# Altium PCB PCB1.PcbDoc (part 1 of 2)
Units mil, origin at the board's own origin, x right, y up, seen from the top; angles counter-clockwise.
Board outline 5117.33 x 2903.43 mil, 4 copper layers (Top Layer, Layer 1, Layer 2, Bottom Layer), stack 62.13 mil thick; 147 components, 97 nets, 532 pads, 86 vias.
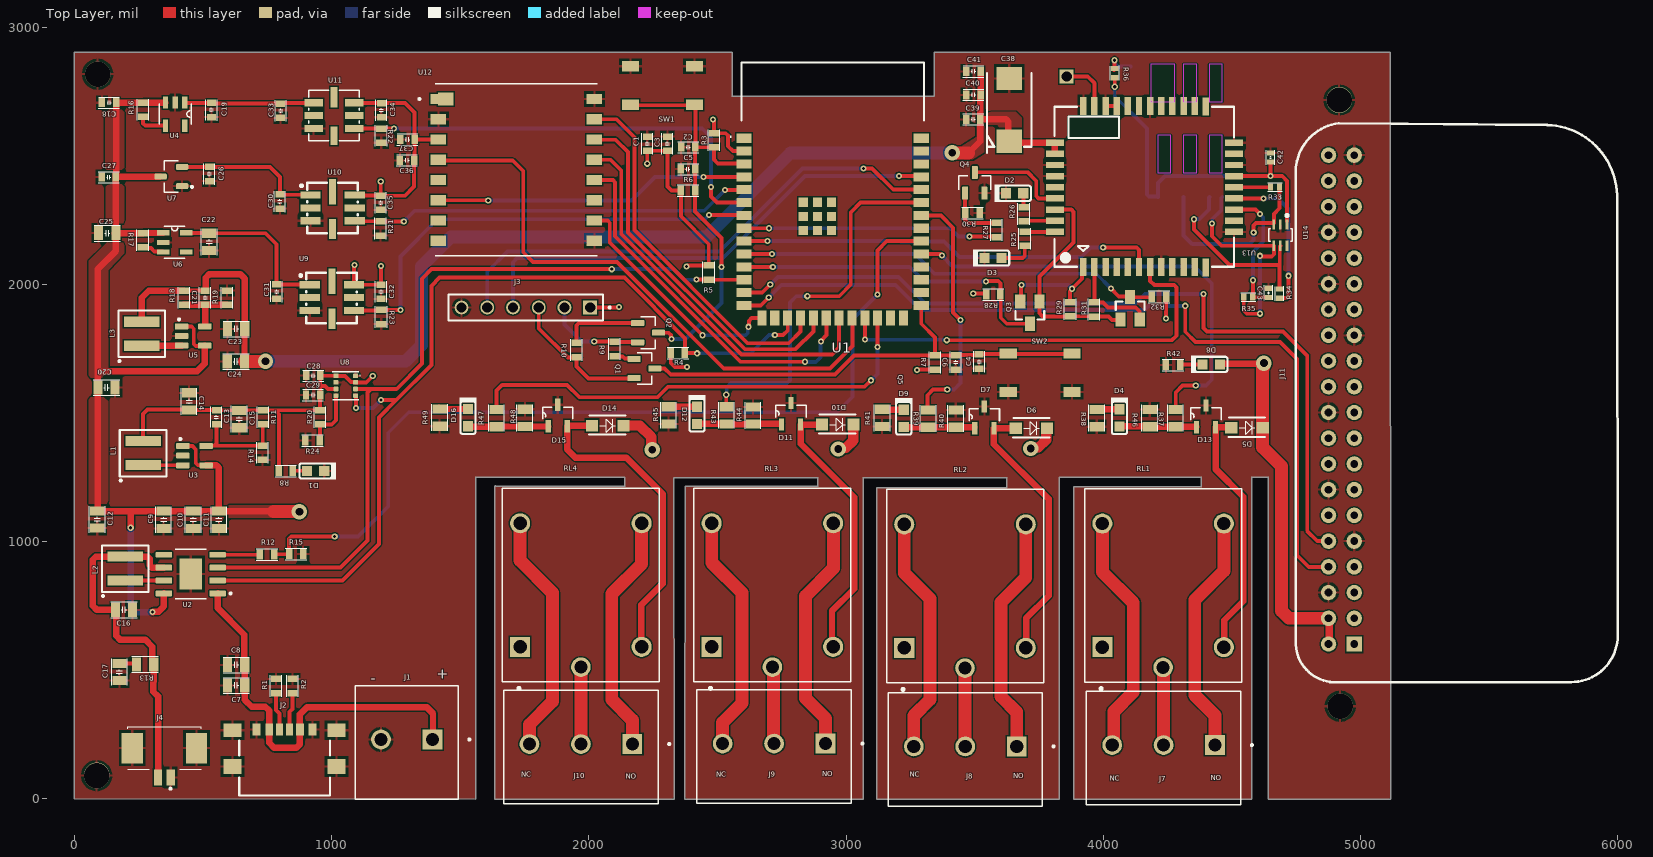
[diagram p0: Top Layer view]
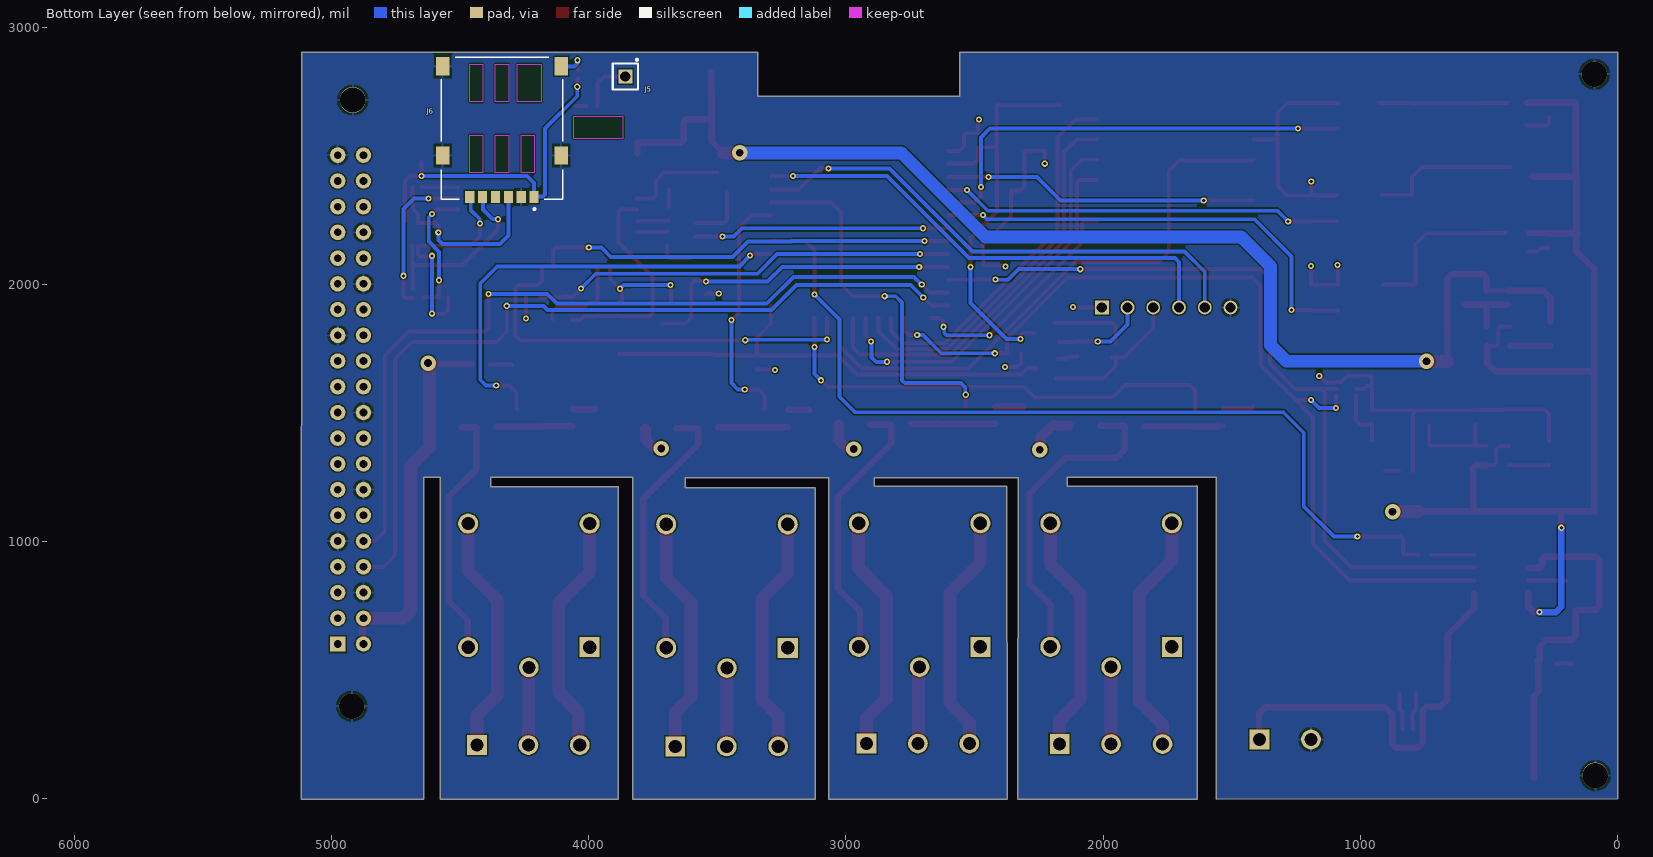
[diagram p1: Bottom Layer view, seen from below]
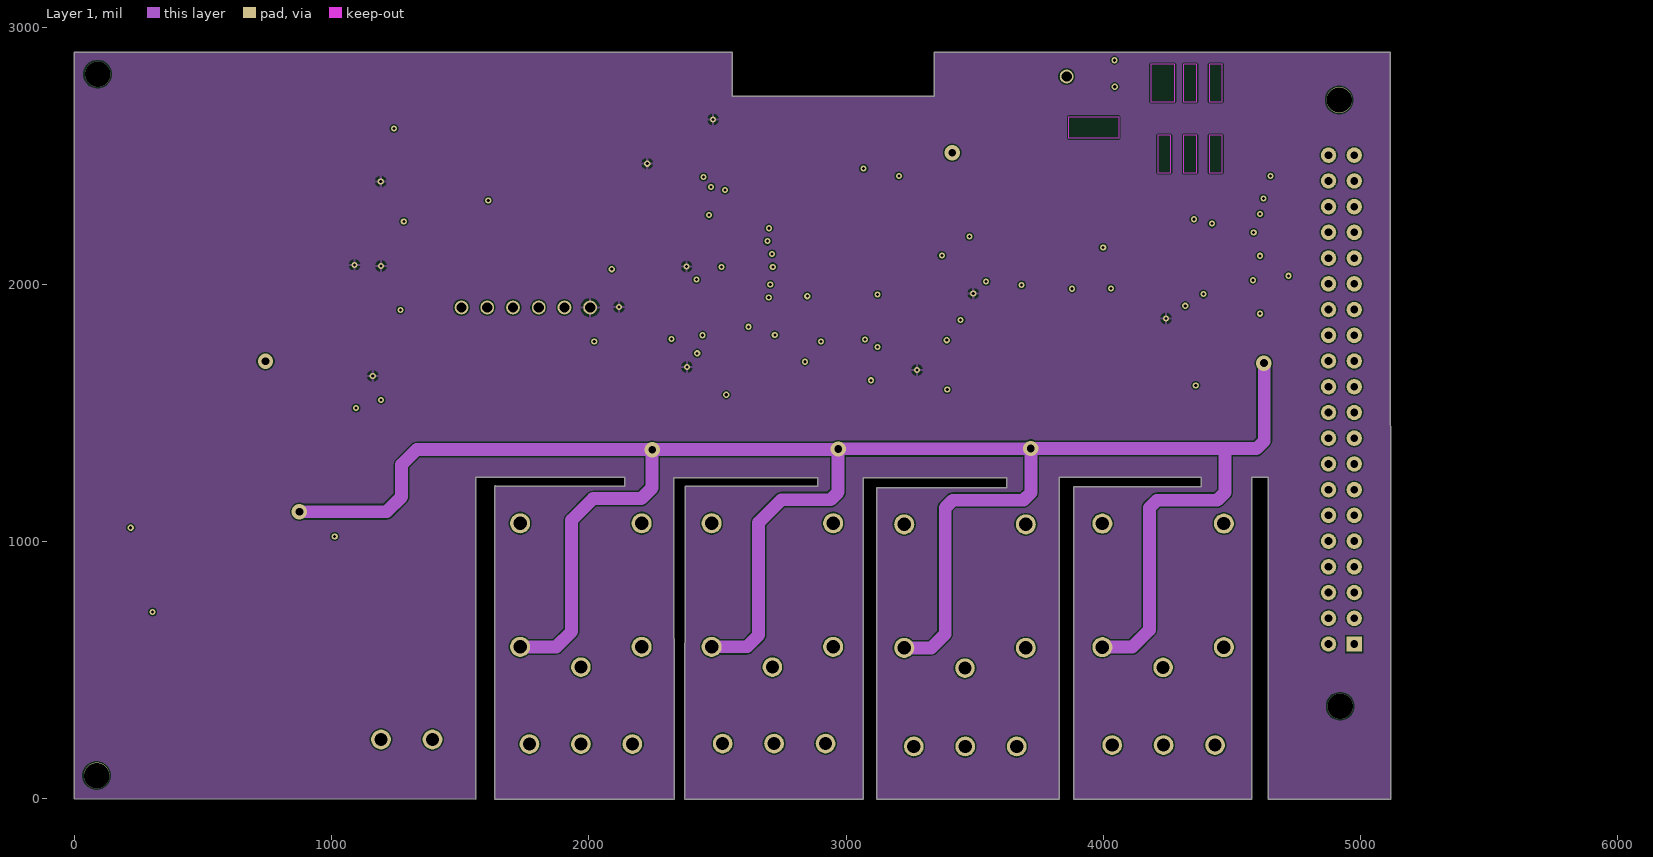
[diagram p2: Layer 1]
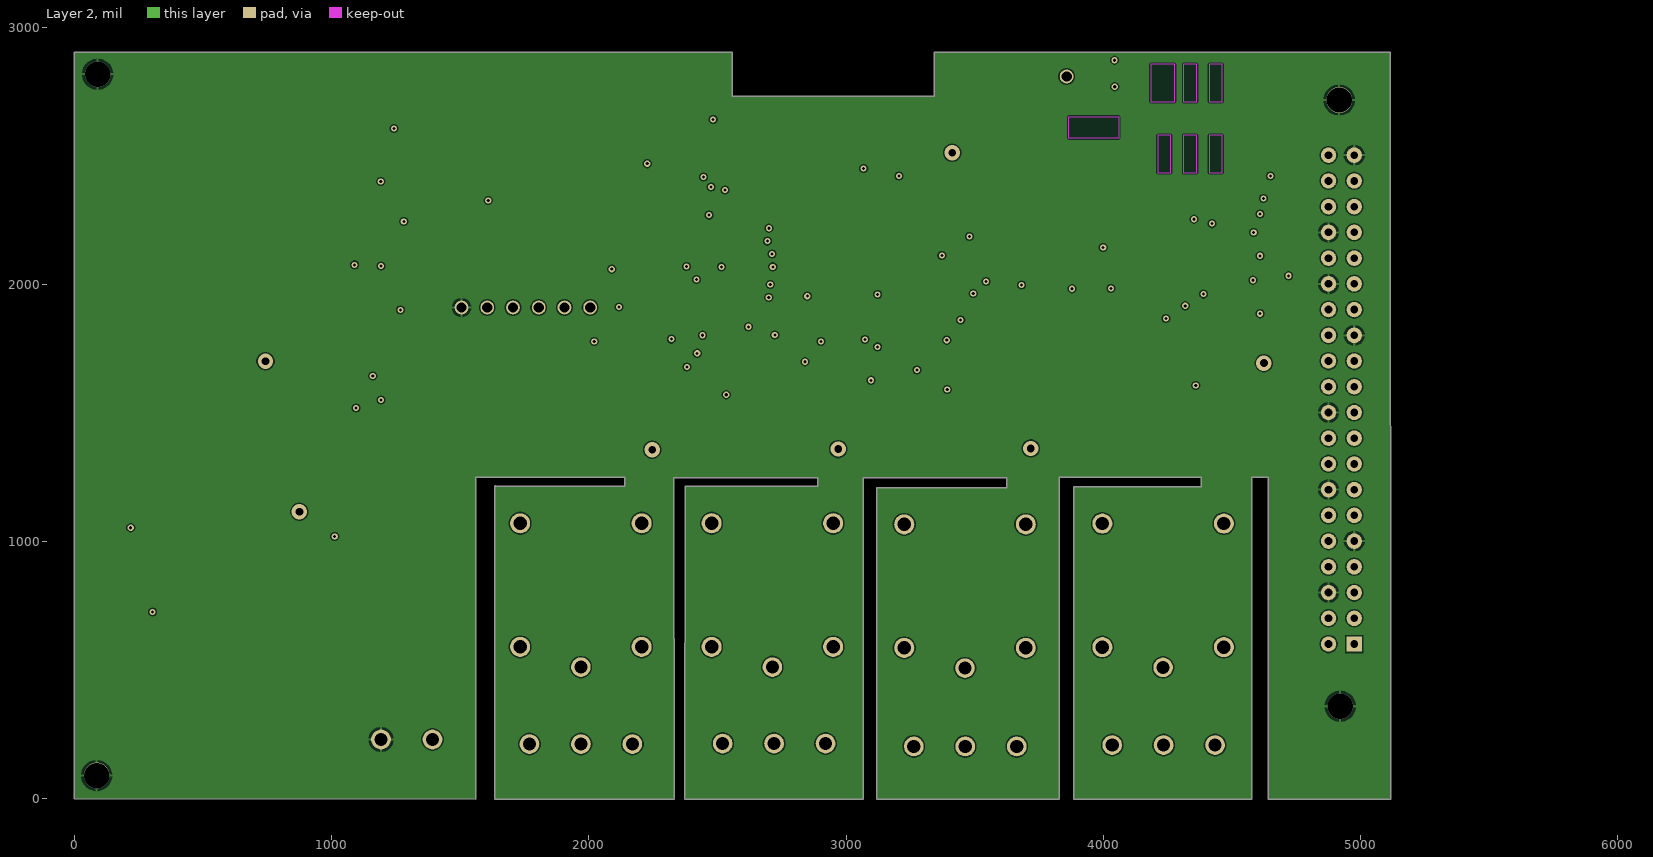
[diagram p3: Layer 2]
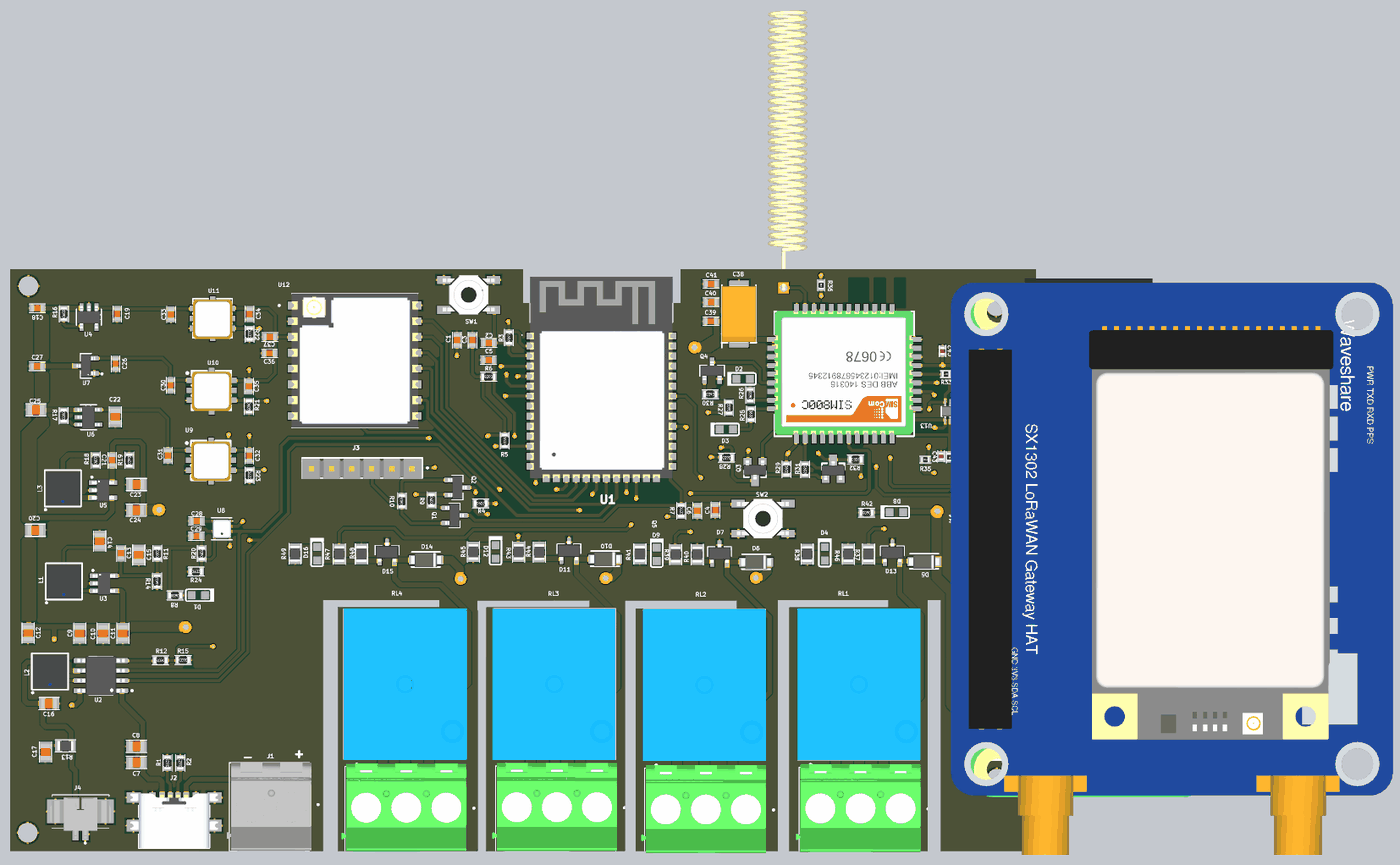
[diagram p5: 3D render of the assembled board from above, using the file's embedded part models]

## Layer stack, top to bottom
Top Solder: solder mask 0.4, Solder Resist, Dk 3.5
Top Layer: signal copper 1.38
Dielectric 4: prepreg 4.21, PP-017, Dk 4.05
Dielectric 2: prepreg 3.91, PP-017, Dk 4.05
Layer 1: signal copper 0.6
Dielectric 1: core 41.93, Core-042, Dk 4.5
Layer 2: signal copper 0.6
Dielectric 3: prepreg 3.91, PP-017, Dk 4.05
Dielectric 5: prepreg 4.21, PP-017, Dk 4.05
Bottom Layer: signal copper 1.38
Bottom Solder: solder mask 0.4, Solder Resist, Dk 3.5

## Board outline
3885,1214 4380,1214 4380,1250 3920,1250 3829,1250 3829,-1.43 3118,-1.43 3118,1209 3624,1209 3624,1248 3066,1248 3066,-1.43 2373.02,-1.43 2374,1216 2889,1216 2889,1249 2830,1249 2402,1248 2330.49,1248 2331.52,-1.43 1635,-1.43 1635,1216 1636,1217 1637,1216 2139,1216 2139,1250 1560,1250 1560,-1.43 -0.19,0.14 0,2902 2558,2902 2558,2732 3343,2732 3343,2902 5115.57,2902 5117.14,-1.43 4641,-1.43 4641,1250 4576,1250 4576,-1.43 3885,-1.43

## Design rules (kind name [scope] priority, off if disabled: settings)
Clearance [All] p1: gap=5 ignorepadtopadclearanceinfootprint=TRUE
MinimumSolderMaskSliver [All] p1: minsoldermaskwidth=3
PolygonConnect [All] p1: connectstyle=Relief reliefconductorwidth=10 reliefentries=4 polygonreliefangle="90 Angle" airgapwidth=10
RoutingVias [All] p1: holewidth=28 width=50 viastyle="Through Hole" minholewidth=28 minwidth=50 maxholewidth=28 maxwidth=50
SilkToSilkClearance [All] p1: silktosilkclearance=0.1
SilkToSolderMaskClearance [IsPad] p1: minsilkscreentomaskgap=0.01 clearancetoexposedcopper=TRUE
SolderMaskExpansion [All] p1: expansion=4 istentingtop=FALSE
SupplyNets "Schematic Supply Nets_8" [InNet('2V5')] p1: voltage=0.000
SupplyNets "Schematic Supply Nets_7" [InNet('3V3')] p2: voltage=0.000
SupplyNets "Schematic Supply Nets_6" [InNet('2V8')] p3: voltage=0.000
SupplyNets "Schematic Supply Nets_5" [InNet('V_Input')] p4: voltage=0.000
SupplyNets "Schematic Supply Nets_4" [InNet('2V')] p5: voltage=0.000
SupplyNets "Schematic Supply Nets_3" [InNet('4V')] p6: voltage=0.000
SupplyNets "Schematic Supply Nets_2" [InNet('VDD_EXT')] p7: voltage=0.000
SupplyNets "Schematic Supply Nets_1" [InNet('5V')] p8: voltage=0.000
SupplyNets "Schematic Supply Nets" [InNet('GND')] p9: voltage=0.000
UnRoutedNet [All] p1: checkbadconnections=TRUE
Width [All] p1: maxlimit=150 minlimit=13.57 preferedwidth=13.57 minimp=50.000000 maximp=50.000000 favimp=50.000000
26 further rules are at their usual default settings.

## Classes and differential pairs
polygon class GND: 4V_L01_P019
component class "Realy Section": D4 D5 D6 D7 D8 D9 D10 D11 D12 D13 D14 D15 D16 J7 J8 J9 J10 R37 R38 R39 R40 R41 R42 R43 R44 R45 R46 R47 R48 R49 RL1 RL2 RL3 RL4
component class TopSheet: J1 J2 J3 R1 R2
component class Sensors: C28 C29 C30 C31 C32 C33 C34 C35 R20 R21 R22 R23 R24 U8 U9 U10 U11
component class R_pi_LG: J11
component class Power: C7 C8 C9 C10 C11 C12 C13 C14 C15 C16 C17 C18 C19 C20 C21 C22 C23 C24 C25 C26 C27 J4 L1 L2 L3 R11 R12 R13 R14 R15 R16 R17 R18 R19 U2 U3 U4 U5 U6 U7
component class MCU: C1 C2 C3 C4 C5 C6 D1 Q1 Q2 R3 R4 R5 R6 R7 R8 R9 R10 SW1 SW2 U1
component class LoRa: C36 C37 U12
component class GSM: C38 C39 C40 C41 C42 C43 D2 D3 J5 J6 Q3 Q4 Q5 R25 R26 R27 R28 R29 R30 R31 R32 R33 R34 R35 R36 U13 U14

## Components (designator, comment, footprint, x,y, rotation, side; value= is the part's Value field where it differs from the comment)
C1 "22uF" C0603 2227,2547 r90 top
C2 "1uF" C0603 2386,2533 r0 top
C3 "22uF" C0603 2305,2547 r90 top
C4 "100nF" C0603 3517,1700 r90 top
C5 "100nF" C0603 2385,2448 r180 top
C6 "100nF" C0603 3426,1696.56 r270 top
C7 "10uF" C0805 629,441 r0 top
C8 "10uF" C0805 629,521 r0 top
C9 "22uF" C0805 347,1085 r90 top
C10 "22uF" C0805 462,1085 r90 top
C11 "22uF" C0805 562,1085 r90 top
C12 "22uF_6.3V" C0805 89,1086 r90 top
C13 "47pF" C0603 552,1484 r90 top
C14 "22uF_6.3V" C0805 446,1545 r270 top
C15 "22uF_6.3V" C0805 641,1476 r90 top
C16 "22uF" C0805 193,735 r180 top
C17 "10uF" C0805 175,493 r90 top
C18 "1uF" C0603 135,2706 r0 top
C19 "1uF" C0603 533,2678 r90 top
C20 "22uF_6.3V" C0805 125,1599 r180 top
C21 "47pF" C0603 508,1948 r90 top
C22 "1uF" C0805 524,2165 r90 top
C23 "22uF_6.3V" C0805 629,1827 r0 top
C24 "22uF_6.3V" C0805 628,1700 r0 top
C25 "1uF" C0805 128,2199 r0 top
C26 "1uF" C0603 525,2429 r90 top
C27 "1uF" C0603 134,2417 r0 top
C28 "100nF" C0603 929,1645 r0 top
C29 "100nF" C0603 928,1570 r0 top
C30 "100nF" C0603 799,2322 r90 top
C31 "100nF" C0603 786,1972 r90 top
C32 "100nF" C0603 1192,1971 r90 top
C33 "100nF" C0603 802,2675 r90 top
C34 "100nF" C0603 1193,2677 r90 top
C35 "100nF" C0603 1191,2317 r90 top
C36 "100nF" C0603 1293,2482 r0 top
C37 "100nF" C0603 1295,2563 r0 top
C38 "TPSE477K010R0060" CAPPM7344X430N 3634,2678 r90 top
C39 "10uF" C0603 3493.96,2641.48 r0 top
C40 "33pF" C0603 3494.96,2736.48 r0 top
C41 "10pF" C0603 3494.96,2827.48 r0 top
C42 "100nF" C0402 4650,2493 r90 top
C43 "22pF" C0402 4642,1967 r270 top
D1 "REDLED" 0603D-B 938,1275 r180 top
D2 "RED" 0603D-B 3655,2354 r0 top
D3 "RED" 0603D-B 3571,2102 r0 top
D4 "Generic LED" 0603D-B 4062,1481 r270 top
D5 "1N4001W-T" SODFL3818X130N 4558,1442 r180 top
D6 "1N4001W-T" SODFL3818X130N 3720,1440 r180 top
D7 "ZXMS6004FFQTA" SOT95P240X100-3N 3537,1483 r90 top
D8 "Generic LED" 0603D-B 4419,1689 r0 top
D9 "Generic LED" 0603D-B 3224,1479 r270 top
D10 "1N4001W-T" SODFL3818X130N 2967,1455 r180 top
D11 "ZXMS6004FFQTA" SOT95P240X100-3N 2786,1497 r90 top
D12 "Generic LED" 0603D-B 2420,1491 r270 top
D13 "ZXMS6004FFQTA" SOT95P240X100-3N 4399,1487 r90 top
D14 "1N4001W-T" SODFL3818X130N 2073,1451 r180 top
D15 "ZXMS6004FFQTA" SOT95P240X100-3N 1879,1490 r90 top
D16 "Generic LED" 0603D-B 1530,1482 r270 top
J1 "1711725" PHOENIX_1711725 1492,439.66 r180 top
J2 "USB4135-GF-A_REVA" GCT_USB4135-GF-A_REVA 817,126 r0 top
J3 "MTSW-106-07-L-S-170" SAMTEC_MTSW-106-07-L-S-170 1755,1910 r0 top
J4 "53261-7002" 532617002 350,157.63 r180 top
J5 "ANT_915MHz" SAMTEC_HTSW-101-24-LM-S 3857,2808 r270 bottom
J6 "NSIM-2-C" CUI_NSIM-2-C 4336.69,2501 r0 bottom
J7 "1711738" 1711738 4534,417.77 r180 top
J8 "1711738" 1711738 3763,412.77 r180 top
J9 "1711738" 1711738 3020,423.77 r180 top
J10 "1711738" 1711738 2269,421.77 r180 top
J11 "Raspberry pi compatible header" pi_header 4975,602 r90 top
L1 "2.2uH-DCR<0.1R-2A" "4.0 mm × 4.0 mm" 267,1344 r90 top
L2 "1uH" "4.0 mm × 4.0 mm" 198,895 r90 top
L3 "2.2uH-DCR<0.1R-2A" "4.0 mm × 4.0 mm" 262,1808 r90 top
Q1 "S8050" SOT95P237X112-3N#1 2216,1673 r0 top
Q2 "S8050" SOT95P237X112-3N#1 2230,1812 r0 top
Q3 "SI2302" SOT23 3714,1890 r180 top
Q4 "S8050" SOT95P237X112-3N#1 3500,2395 r90 top
Q5 "SI2302" SOT23 4104,1907 r0 top
R1 "5.11k" R0603 784,439 r90 top
R2 "5.11k" R0603 848,439 r90 top
R3 "10K" R0603 2487,2560 r270 top
R4 "4.7K" R0603 2346,1733 r0 top
R5 "4.7K" R0603 2466,2046 r270 top
R6 "4.7K" R0603 2385,2365 r180 top
R7 "4.7K" R0603 3346,1696 r270 top
R8 "470R" R0603 822,1274 r180 top
R9 "10K" R0603 2100,1749 r270 top
R10 "10K" R0603 1952,1745 r90 top
R11 "453K" R0603 733,1483 r90 top
R12 "NC" R0603 749,950 r180 top
R13 "2R" R0805 275,523 r0 top
R14 "100K" R0603 732,1345 r90 top
R15 "NC/10K" R0603 862,952 r180 top
R16 "200k" R0603 267,2679 r90 top
R17 "200K" R0603 266,2171 r270 top
R18 "560K" R0603 426,1948 r90 top
R19 "100K" R0603 593,1948 r270 top
R20 "NC" R0603 955,1483 r90 top
R21 "4.7K" R0603 1190,2217 r270 top
R22 "4.7K" R0603 1193,2578 r270 top
R23 "4.7K" R0603 1193,1873 r270 top
R24 "0R" R0603 926,1393 r0 top
R25 "330R" R0603 3694,2177 r270 top
R26 "330R" R0603 3690.53,2273 r90 top
R27 "1k" R0603 3585,2211 r90 top
R28 "10K" R0603 3572,1961 r180 top
R29 "100K" R0603 3871,1903 r270 top
R30 "4.7K" R0603 3491,2278 r180 top
R31 "10K" R0603 3964,1902 r270 top
R32 "10K" R0603 4216,1952 r0 top
R33 "22R" R0402 4667,2378 r0 top
R34 "22R" R0402 4685,1964 r90 top
R35 "22R" R0402 4563,1951 r180 top
R36 "10K" R0402 4044,2821 r90 top
R37 "10K" R0805 4280,1480 r270 top
R38 "1K" R0805 3974,1480 r270 top
R39 "10K" R0805 3319,1478 r270 top
R40 "10K" R0805 3426,1478 r90 top
R41 "1K" R0805 3140,1481 r270 top
R42 "470" R0603 4270.44,1687 r180 top
R43 "10K" R0805 2535,1491 r270 top
R44 "10K" R0805 2638,1490 r90 top
R45 "1K" R0805 2310,1491 r270 top
R46 "10K" R0805 4180,1480 r90 top
R47 "10K" R0805 1641,1480 r270 top
R48 "10K" R0805 1751,1481 r90 top
R49 "1K" R0805 1420,1482 r270 top
RL1 "SRD-05VDC-SL-C" SRD-05VDC-SL-C 4232,830.11 r90 top
RL2 "SRD-05VDC-SL-C" SRD-05VDC-SL-C 3462,827.11 r90 top
RL3 "SRD-05VDC-SL-C" SRD-05VDC-SL-C 2713.22,831.27 r90 top
RL4 "SRD-05VDC-SL-C" SRD-05VDC-SL-C 1969,831.11 r90 top
SW1 "CPG151101S11" "5.2 mm × 5.2 mm SW" 2286,2773 r0 top
SW2 "CPG151101S11" "5.2 mm × 5.2 mm SW" 3754,1657 r180 top
U1 "ESP32-S3-WROOM-1-N16R8" ESP32S3WROOM1N8R2 2932.51,2385.91 r0 top
U2 "IP5306" SOP127P600X165-9N 452.47,874 r180 top
U3 "SY8089" SOT95P280X145-5N 467,1334 r0 top
U4 "BL8555-28PRA" TSOT-23_S5 392,2662 r270 top
U5 "SY8089" SOT95P280X145-5N 462,1799 r0 top
U6 "BL8555-25PRA" TSOT-23_S5 390,2163 r0 top
U7 "ME6206A20M3G" SOT95P237X112-3N#2 377,2419 r180 top
U8 "BME280" PSON65P250X250X100-8N 1055,1606 r0 top
U9 "GM-202B" LCC-8_L5.0-W5.0-P1.27-BL 1001,1939 r0 top
U10 "GM-802B" LCC-8_L5.0-W5.0-P1.27-BL 1004,2288 r0 top
U11 "GM-402B" SENSORS-SMD_GM-402B 1009,2652 r0 top
U12 "RA-01s_LORA" MODULE_RA-01s_LORA 1718.15,2444.89 r0 top
U13 "SIM800C GSM/GPRS Module" SMD 3921.76,2066.7 r180 top
U14 "SOT363" SOT363 4658.59,2142.68 r270 top

## Footprints (in the part's own frame and the unit in brackets; to place one, negate y for a bottom-side part, rotate by r counter-clockwise, add the part's x,y. Pads: shape width x height; smd on the part's side, far side on the other; paste and mask are expansions set on the pad)
"4.0 mm × 4.0 mm" [mm] "AE433PZA Outgassing Compliant Power Inductor"
  rect 1x3.5 smd: 1(-1.185,0) 2(1.185,0)
  silkscreen extent -2.8,-2.3 2.3,2.3, body extent -2.15,-2.15 2.15,2.15, height 2.1
"5.2 mm × 5.2 mm SW" [mm] "SWITCH TACTILE SPST-NO 0.05A  TL3342F260QG"
  rect 1.7x1 smd: 1(-3.15,-1.9) 1(3.15,-1.9) 2(-3.15,1.9) 2(3.15,1.9)
  body extent -3.3,-2.5 3.3,2.5, height 1.52
0603D-B [mm] "Blue LED  PKG=0603"
  rect 1x1 smd paste+0 mask+0: 1(0.85,0) 2(-0.85,0)
  silkscreen extent -1.99,-0.85 1.6,0.85, body extent -0.8,-0.4 0.8,0.4, height 0.25
1711738 [mm] "PCB Terminal Screw 5.08mm 12AWG 400V 24A 3 Position COMBICON MKDS Series"
  rect 1.95x1.95 / inner round 1.95 / far side rect 1.95x1.95 hole 1.3: 1(2.54,5.3)
  round 1.95 hole 1.3: 2(7.62,5.3) 3(12.7,5.3)
  silkscreen extent -1.2,0 15.24,11.2, body extent -0.16,-0.39 15.65,10.8, height 18.29
532617002 [mm]
  rect 0.8x1.6 smd: 1(-0.625,1.9) 2(0.625,1.9)
  rect 2.1x3 smd: 3(-3.175,-1) 4(3.175,-1)
  silkscreen extent -3.62,-3.1 3.62,3.1, body extent -3.83,-2.75 3.83,2.45, height 3.38
C0402 [mm]
  rect 0.51x0.7 smd mask+0.05: 1(-0.45,0) 2(0.45,0)
  silkscreen extent -0.73,-0.43 0.73,0.43, body extent -0.5,-0.27 0.5,0.28, height 0.51
C0603 [mm]
  rect 0.64x0.89 smd mask+0.05: 1(-0.7,0) 2(0.7,0)
  silkscreen extent -1.05,-0.55 1.02,0.55, body extent -0.8,-0.4 0.8,0.4, height 0.5
C0805 [mm]
  rect 0.9x1.4 smd mask+0.05: 1(-0.85,0) 2(0.85,0)
  silkscreen extent -1.3,-0.77 1.3,0.77, body extent -1,-0.63 1,0.62, height 1.25
CAPPM7344X430N [mm]
  rect 2.3x2.5 smd: 1(-3.1,0) 2(3.1,0)
  silkscreen extent -4.25,-2.17 3.65,2.18, body extent -3.65,-2.17 3.65,2.17, height 4.3
CUI_NSIM-2-C [mm]
  rect 0.9x1.2 smd: C1(-3.17,4.1) C2(-0.63,4.1) C3(1.91,4.1) C5(-1.9,4.1) C6(0.64,4.1) C7(3.18,4.1)
  rect 1.3x1.8 smd: S/W(-5.85,-8.8) SH1(-5.85,0) SH2(5.85,0) SH3(5.85,-8.8)
  Keep-Out Layer region: -1.89,-2 -3.19,-2 -3.19,1.7 -1.89,1.7
  Keep-Out Layer region: -1.49,-9 -3.89,-9 -3.89,-5.3 -1.49,-5.3
  Keep-Out Layer region: 3.19,-9 1.89,-9 1.89,-5.3 3.19,-5.3
  Keep-Out Layer region: 0.65,-9 -0.65,-9 -0.65,-5.3 0.65,-5.3
  Keep-Out Layer region: 3.19,-2 1.89,-2 1.89,1.7 3.19,1.7
  Keep-Out Layer region: 0.65,-2 -0.65,-2 -0.65,1.7 0.65,1.7
  silkscreen extent -6,-9.7 6,5.4, body extent -6.18,-9.84 6.22,4.26, height 1.45
ESP32S3WROOM1N8R2 [mm] "Bluetooth, WiFi 802.11b/g/n, Bluetooth v5.0 Transceiver Module 2.4GHz PCB Trace Surface Mount"
  rect 1.5x0.9 smd: 1(-8.369,4.625) 2(-8.369,3.355) 3(-8.369,2.085) 4(-8.369,0.815) 5(-8.369,-0.455) 6(-8.369,-1.725) 7(-8.369,-2.995) 8(-8.369,-4.265) 9(-8.369,-5.535) 10(-8.369,-6.805) 11(-8.369,-8.075) 12(-8.369,-9.345) 13(-8.369,-10.615) 14(-8.369,-11.885) 27(9.131,-11.885) 28(9.131,-10.615) 29(9.131,-9.345) 30(9.131,-8.075) 31(9.131,-6.805) 32(9.131,-5.535) 33(9.131,-4.265) 34(9.131,-2.995) 35(9.131,-1.725) 36(9.131,-0.455) 37(9.131,0.815) 38(9.131,2.085) 39(9.131,3.355) 40(9.131,4.625)
  rect 0.9x1.5 smd: 15(-6.604,-13.135) 16(-5.334,-13.135) 17(-4.064,-13.135) 18(-2.794,-13.135) 19(-1.524,-13.135) 20(-0.254,-13.135) 21(1.016,-13.135) 22(2.286,-13.135) 23(3.556,-13.135) 24(4.826,-13.135) 25(6.096,-13.135) 26(7.366,-13.135)
  rect 0.9x0.9 smd: 41(-1.119,-3.095) 42(-1.119,-1.695) 43(-2.519,-1.695) 44(-2.519,-3.095) 45(-2.519,-4.495) 46(-1.119,-4.495) 47(0.281,-4.495) 48(0.281,-3.095) 49(0.281,-1.695)
  silkscreen extent -9.72,4.72 9.38,12.11, body extent -8.62,-13.38 9.38,12.11, height 3.25
GCT_USB4135-GF-A_REVA [mm]
  rect 0.7x1.2 smd: A5(-0.5,3.635) B5(0.5,3.635)
  rect 0.76x1.2 smd: A9(1.52,3.635) B9(-1.52,3.635)
  rect 0.8x1.2 smd: A12(2.75,3.635) B12(-2.75,3.635)
  rect 1.8x1.35 smd: S1(-5.125,3.58) S4(5.125,3.58)
  rect 1.8x1.5 smd: S2(-5.125,0) S3(5.125,0)
  silkscreen extent -4.47,-2.85 4.47,2.59, body extent -5.57,-2.85 5.57,4.05, height 3.25
LCC-8_L5.0-W5.0-P1.27-BL [mm]
  rect 2x0.7 smd: 1(-2.186,1.507) 2(-2.186,0.237) 3(-2.186,-1.033) 5(2.186,-1.033) 6(2.186,0.237) 7(2.186,1.507)
  rect 0.7x2 smd: 4(0,-1.842)
  rect 0.7x2.5 smd: 8(0,1.842)
  silkscreen extent -3.19,-2.27 2.46,2.71, body extent -2.5,-2.37 2.5,2.63, height 1.51
MODULE_RA-01s_LORA [mm]
  rect 1.536x1 smd: 1(-7.7,6.985) 2(-7.7,5) 3(-7.7,3) 4(-7.7,1) 5(-7.7,-1) 6(-7.7,-3) 7(-7.7,-5) 8(-7.7,-7) 9(7.7,-7) 10(7.7,-5) 11(7.7,-3) 12(7.7,-1) 13(7.7,1) 14(7.7,3) 15(7.7,5) 16(7.7,7)
  rect 1.536x1.27 smd: 1(-6.974,7)
  silkscreen extent -9.68,-8.5 8,8.5, body extent -8,-8.5 8,8.5, height 3.31
PHOENIX_1711725 [mm]
  rect 1.95x1.95 / inner round 1.95 / far side rect 1.95x1.95 hole 1.3: 1(2.54,5.3)
  round 1.95 hole 1.3: 2(7.62,5.3)
  silkscreen extent -1.2,0 10.16,11.2, body extent -0.25,0 10.48,11.18, height 18.3
pi_header [mil]
  rect 60x60 hole 30: 1(0,0)
  round 60 hole 30: 2(0,100) 3(100,0) 4(100,100) 5(200,0) 6(200,100) 7(300,0) 8(300,100) 9(400,0) 10(400,100) 11(500,0) 12(500,100) 13(600,0) 14(600,100) 15(700,0) 16(700,100) 17(800,0) 18(800,100) 19(900,0) 20(900,100) 21(1000,0) 22(1000,100) 23(1100,0) 24(1100,100) 25(1200,0) 26(1200,100) 27(1300,0) 28(1300,100) 29(1400,0) 30(1400,100) 31(1500,0) 32(1500,100) 33(1600,0) 34(1600,100) 35(1700,0) 36(1700,100) 37(1800,0) 38(1800,100) 39(1900,0) 40(1900,100)
  silkscreen extent -148,-1024 2024,228, body extent -622,-1920 2252,284, height 811
PSON65P250X250X100-8N [mm]
  rrect25% 0.49x0.45 smd: 1(0.97,0.975) 2(0.97,0.325) 3(0.97,-0.325) 4(0.97,-0.975) 5(-0.97,-0.975) 6(-0.97,-0.325) 7(-0.97,0.325) 8(-0.97,0.975)
  silkscreen extent -1.33,-1.39 1.43,1.4, body extent -1.25,-1.25 1.25,1.25, height 1
R0402 [mm]
  rect 0.51x0.7 smd mask+0.05: 1(-0.45,0) 2(0.45,0)
  silkscreen extent -0.73,-0.43 0.73,0.43, body extent -0.52,-0.3 0.52,0.3, height 0.4
R0603 [mm]
  rect 0.64x1 smd mask+0.05: 1(-0.7,0) 2(0.7,0)
  silkscreen extent -1.05,-0.58 1.05,0.58, body extent -0.9,-0.5 0.9,0.5, height 0.56
R0805 [mm]
  rect 0.9x1.4 smd mask+0.05: 1(-0.85,0) 2(0.85,0)
  silkscreen extent -1.3,-0.77 1.3,0.77, body extent -1,-0.63 1,0.63, height 0.66
SAMTEC_HTSW-101-24-LM-S [mm]
  rect 1.37x1.37 / inner round 1.37 / far side rect 1.37x1.37 hole 1.02: 01(0,0)
  silkscreen extent -1.75,-1.24 1.27,1.24, body extent -35.12,-4.03 0.38,3.27, height 5.57
SAMTEC_MTSW-106-07-L-S-170 [mm]
  rect 1.37x1.37 / inner round 1.37 / far side rect 1.37x1.37 hole 1.02: 01(6.35,0)
  round 1.37 hole 1.02: 02(3.81,0) 03(1.27,0) 04(-1.27,0) 05(-3.81,0) 06(-6.35,0)
  silkscreen extent -7.62,-1.27 8.37,1.27, body extent -7.68,-1.4 7.56,1.14, height 6.6
SENSORS-SMD_GM-402B [mm] "The GM-402B is a compact MEMS-based combustible gas sensor by Winsen Electronics, designed to detect gases like methane (CH₄) and propane (C₃H₈) within a 1–10,000 ppm range. It operates with a heater voltage of 2.8V ± 0.1V (AC or DC) and supports a circuit voltage up to 24V DC. The sensor features an 8-pin SMD package with the following configuration /  / Pin 1 (RH1) Heater terminal 1 /  / Pin 2 No connection /  / Pin 3 (RH2) Heater terminal 2 /  / Pin 4 No connection /  / Pin 5 (RS1) Sensor output terminal 1 /  / Pin 6 No connection /  / Pin 7 (RS2) Sensor output terminal 2 /  / Pin 8 No connection"
  rect 1.8x0.7 smd: 1(-1.999,1.369) 2(-1.999,0.099) 3(-1.999,-1.171) 5(1.999,-1.171) 6(1.999,0.099) 7(1.999,1.369)
  rect 0.7x1.8 smd: 4(0,-1.9)
  rect 0.7x2 smd: 8(0,1.9)
  silkscreen extent -2.5,-2.4 2.5,2.6, body extent -2.5,-2.5 2.5,2.5, height 1.51
SMD [mil]
  rect 25x70 smd: 1(0,0) 2(-43.31,0) 3(-86.61,0) 4(-129.92,0) 5(-173.23,0) 6(-216.54,0) 7(-259.84,0) 8(-303.15,0) 9(-346.46,0) 10(-389.76,0) 11(-433.07,0) 12(-476,0.5) 22(-476,-625.48) 23(-433.07,-625.98) 24(-389.76,-625.98) 25(-346.46,-625.98) 26(-303.15,-625.98) 27(-259.84,-625.98) 28(-216.54,-625.98) 29(-173.23,-625.98) 30(-129.92,-625.98) 31(-86.61,-625.98) 32(-43.31,-625.98) 33(0,-625.98)
  rect 70x25 smd: 13(-586.24,-137.3) 14(-586.24,-180.6) 15(-586.24,-223.91) 16(-586.24,-267.22) 17(-586.24,-310.52) 18(-586.24,-353.83) 19(-586.24,-397.14) 20(-586.24,-440.44) 21(-586.24,-483.75) 34(110.61,-483.75) 35(110.61,-440.44) 36(110.61,-397.14) 37(110.61,-353.83) 38(110.61,-310.52) 39(110.61,-267.22) 40(110.61,-223.91) 41(110.61,-180.6) 42(110.61,-137.3)
  Keep-Out Layer region: 57.38,-500.58 57.38,-585 -137.38,-585 -137.38,-500.58
  silkscreen extent -586,-624 112,-2, body extent -581,-628 111,-10, height 90
SODFL3818X130N [mm]
  rect 1.2x1.15 smd: 1(-1.55,0) 2(1.55,0)
  silkscreen extent -1.78,-1.02 1.83,0.89, body extent -1.9,-0.9 1.9,0.9, height 1.3
SOP127P600X165-9N [mm]
  rrect25% 1.61x0.59 smd: 1(-2.655,1.905) 2(-2.655,0.635) 3(-2.655,-0.635) 4(-2.655,-1.905) 5(2.655,-1.905) 6(2.655,-0.635) 7(2.655,0.635) 8(2.655,1.905)
  rect 2.21x3.1 smd paste-3: 9(0,0)
  silkscreen extent -4.04,-2.45 1.53,2.45, body extent -3,-2.45 3,2.45, height 1.65
SOT23 [mm]
  rect 1x1.4 smd: 1(-0.95,-1.1) 2(0.95,-1.1) 3(0,1.1)
  silkscreen extent -1.42,-0.15 1.42,0.66, body extent -1.46,-1.44 1.46,0.93, height 1.12
SOT95P237X112-3N#1 [mm]
  rrect25% 1.3x0.59 smd: 1(-1.025,0.95) 2(-1.025,-0.95) 3(1.025,0)
  silkscreen extent -0.7,-1.56 0.7,1.56, body extent -1.18,-1.46 1.18,1.46, height 1.12
SOT95P237X112-3N#2 [mm]
  rrect50% 1.23x0.59 smd: 1(-1.06,0.95) 2(-1.06,-0.95) 3(1.06,0)
  silkscreen extent -2.13,-1.56 0.7,1.56, body extent -1.17,-1.46 1.17,1.46, height 1.12
SOT95P240X100-3N [mil]
  rect 48x20 smd: 1(-42,37) 2(-42,-37) 3(42,0)
  silkscreen extent -13,-59 33,59, body extent -47,-57 47,57, height 35
SOT95P280X145-5N [mm]
  rrect25% 1.32x0.59 smd: 1(-1.145,0.95) 2(-1.145,0) 3(-1.145,-0.95) 4(1.145,-0.95) 5(1.145,0.95)
  silkscreen extent -1.5,1.55 -1.3,1.75, body extent -1.4,-1.45 1.4,1.45, height 1.45
SOT363 [mil]
  rect 40x10 smd: 1(-90,55) 2(-90,29.41) 3(-90,3.82) 4(-7.32,3.82) 5(-7.32,29.41) 6(-7.32,55)
  silkscreen extent -130,-16 -25,75, body extent -91,-11 -9,71, height 43
SRD-05VDC-SL-C [mm] "SRD-05VDC-SL-C"
  rect 1.98x1.98 / inner round 1.98 / far side rect 1.98x1.98 hole 1.32: A1(-6.1,6)
  round 1.98 hole 1.32: A2(-6.1,-6) NC(6.1,6) NO(6.1,-6)
  round 1.935 hole 1.29: COM(-8.1,0)
  silkscreen extent -10.3,-7.75 9.55,7.75, body extent -9.6,-7.8 9.6,7.8, height 15.8
TSOT-23_S5 [mil]
  rect 48x20 smd: 1(-45,37.4) 2(-45,0) 3(-45,-37.4) 4(45,-37.4) 5(45,37.4)
  silkscreen extent -40,-62 40,62, body extent -55,-57 55,57, height 39

## Part data
C1 C2 C3 C4 C5 C6 C7 C8 C9 C10 C11 C12 C13 C14 C15 C16 C17 C18 C19 C20 C21 C22 C23 C24 C25 C26 C27 C28 C29 C30 C31 C32 C33 C34 C35 C36 C37 C39 C40 C41 C42 C43: library part "Capacitor non polar", "This Non-Polarized Capacitor Design Library provides accurate schematic symbols and IPC-compliant PCB footprints for standard non-polarized capacitors, including MLCCs (ceramic capacitors) in common SMD sizes like 0402, 0603, 0805,1206 and 1210.", Package="1005 Taiyo Yuden", Check_prices=https://www.snapeda.com/parts/GJM1555C1HR10BB01J/Murata/view-part/?ref=eda, MF=Murata, MP=GJM1555C1HR10BB01J, SnapEDA_Link=https://www.snapeda.com/parts/GJM1555C1HR10BB01J/Murata/view-part/?ref=snap
C38: "Capacitor tantalum TPS 2717 470uF 10V AVX +/-10% 470uF 10 V dc SMD Tantalum Electrolytic Capacitor, 7343-43 ESR 60m +125C TPS", Manufacturer_Name="Kyocera AVX", Mouser Part Number=581-TPSE477K010R0060, Datasheet Link=https://componentsearchengine.com/Datasheets/1/TPSE477K010R0060.pdf, Geometry.Height=4.3mm, Manufacturer_Part_Number=TPSE477K010R0060, Mouser Price/Stock=https://www.mouser.com/Search/Refine.aspx?Keyword=581-TPSE477K010R0060
D1 D2 D3 D4 D8 D9 D12 D16: library part LED, "Generic LED SMD", Package=None, Check_prices=https://www.snapeda.com/parts/LHN974%20RED%20LED%201206/Osram/view-part/?ref=eda, MF=Osram, MP="LHN974 RED LED 1206", SnapEDA_Link=https://www.snapeda.com/parts/LHN974%20RED%20LED%201206/Osram/view-part/?ref=snap
D5 D6 D10 D14: "Rectifiers SOD-123,1A,50V,GP", Manufacturer_Name=Rectron, Mouser Part Number=583-1N4001W-T, Geometry.Height=1.3mm, Manufacturer_Part_Number=1N4001W-T, Mouser Price/Stock=https://www.mouser.co.uk/ProductDetail/Rectron/1N4001W-T?qs=QNEnbhJQKvbnHIVMak28nQ%3D%3D
J1: "PCB Terminal Screw 5.08mm 12AWG 400V 24A 2 Position COMBICON MKDS Series", Package=None, Check_prices=https://www.snapeda.com/parts/1711725/Phoenix+Contact/view-part/?ref=eda, MF="Phoenix Contact", MP=1711725, SnapEDA_Link=https://www.snapeda.com/parts/1711725/Phoenix+Contact/view-part/?ref=snap
J2: "Type C Receptacle, Horizontal, SMT, For Power Charging Only", Package=None, Availability="In Stock", Check_prices=https://www.snapeda.com/parts/USB4135-GF-A/Global+Connector+Technology/view-part/?ref=eda, MF="Global Connector Technology", MP=USB4135-GF-A, Price=None, Purchase-URL=https://pricing.snapeda.com/search/part/USB4135-GF-A/?ref=eda, SnapEDA_Link=https://www.snapeda.com/parts/USB4135-GF-A/Global+Connector+Technology/view-part/?ref=snap
J3 J5: Package=None, Availability=Unavailable, Price=None
  J3: MP=MTSW-106-07-L-S-170
  J5: MP=HTSW-101-24-LM-S
J4: "Headers & Wire Housings PicoBlade SMT RA PKG 0.38 GOLD 2P", Manufacturer_Name=Molex, Mouser Part Number=538-53261-7002, Datasheet Link=https://www.molex.com/pdm_docs/sd/532617002_sd.pdf, Geometry.Height=3.4mm, Manufacturer_Part_Number=53261-7002, Mouser Price/Stock=https://www.mouser.co.uk/ProductDetail/Molex/53261-7002?qs=0lSvoLzn4L%2F9TYfu1Dmicg%3D%3D
J6: "Nano SIM Card Connectors, 6 Positions, Connector, Hinged, Surface Mount, 1.4 mm Height Above Board, Gold Flash", Package=None, Check_prices=https://www.snapeda.com/parts/NSIM-2-C/Same+Sky/view-part/?ref=eda, MF="Same Sky", MP=NSIM-2-C, SnapEDA_Link=https://www.snapeda.com/parts/NSIM-2-C/Same+Sky/view-part/?ref=snap
J7 J8 J9 J10: "PCB Terminal Screw 5.08mm 12AWG 400V 24A 3 Position COMBICON MKDS Series"
J11: library part pi_header
L1 L2 L3: library part Inductor, "SMD Inductor Generic", Inductance="1500 µH", PartNumber=744043152, ComponentLink1Description="Manufacturer URL", ComponentLink1URL=http://www.we-online.com, ComponentLink2Description=Datasheet, ComponentLink2URL=http://www.we-online.de/katalog/media/pdf/744043152.pdf, DatasheetVersion="ver 6, Aug-2010", PackageDescription="SMD Inductor, 2-Leads, Body 4.8 x 4.8 mm", PackageReference=WE-TPC-4828-MH
Q1 Q2 Q4: "Bipolar (BJT) Transistor NPN 25 V 500 mA 150MHz 300 mW Surface Mount SOT-23", Package=None, Availability="In Stock", Check_prices=https://www.snapeda.com/parts/S8050/Umwelt+Sensor+Teknik/view-part/?ref=eda, MF=UMW, MP=S8050, Price=None, Purchase-URL=https://pricing.snapeda.com/search/part/S8050/?ref=eda, SnapEDA_Link=https://www.snapeda.com/parts/S8050/Umwelt+Sensor+Teknik/view-part/?ref=snap
Q3 Q5: "N-Channel 20 V 2.6A (Ta) 710mW (Ta) Surface Mount SOT-23-3 (TO-236)", Package="SOT-23-3 Vishay Siliconix", Check_prices=https://www.snapeda.com/parts/SI2302/Vishay/view-part/?ref=eda, MF="Vishay Siliconix", MP=SI2302, SnapEDA_Link=https://www.snapeda.com/parts/SI2302/Vishay/view-part/?ref=snap
R1 R2 R3 R4 R5 R6 R7 R8 R9 R10 R11 R12 R13 R14 R15 R16 R17 R18 R19 R20 R21 R22 R23 R24 R25 R26 R27 R28 R29 R30 R31 R32 R33 R34 R35 R36 R37 R38 R39 R40 R41 R42 R43 R44 R45 R46 R47 R48 R49: library part Resistor, "This Library provides a comprehensive set of schematic symbols and PCB footprints for standard resistor packages (e.g., 0402, 0603, 0805, 1206)."
SW1 SW2: library part Switch, Manufacturer Part Number=CPG151101S11, Supplier 3=LCSC, Supplier Part Number 3=C41430893
U1: "Bluetooth, WiFi 802.11b/g/n, Bluetooth v5.0 Transceiver Module 2.4GHz PCB Trace Surface Mount"
U2: "Fully-Integrated Power Bank System-On-Chip with 2.1A charger, 2.4A discharger", Package="SOIC-4 INJOINIC", Check_prices=https://www.snapeda.com/parts/IP5306/Injoinic/view-part/?ref=eda, MF=Injoinic, MP=IP5306, SnapEDA_Link=https://www.snapeda.com/parts/IP5306/Injoinic/view-part/?ref=snap
U3 U5: library part SY8089A1
U4: "BL8555-28PRA   2.8 V regulator", Package="SOT-5 Analog Devices", Check_prices=https://www.snapeda.com/parts/LT1722CS5%23TRMPBF/Analog+Devices/view-part/?ref=eda, MF="Analog Devices", MP=LT1722CS5#TRMPBF, SnapEDA_Link=https://www.snapeda.com/parts/LT1722CS5%23TRMPBF/Analog+Devices/view-part/?ref=snap
U6: "BL8555-25PRA   2.5 V regulator", Package="SOT-5 Analog Devices", Check_prices=https://www.snapeda.com/parts/LT1722CS5%23TRMPBF/Analog+Devices/view-part/?ref=eda, MF="Analog Devices", MP=LT1722CS5#TRMPBF, SnapEDA_Link=https://www.snapeda.com/parts/LT1722CS5%23TRMPBF/Analog+Devices/view-part/?ref=snap
U7: "2V regulator MICRONE(Nanjing Micro One Elec) ME6206A20M3G", Package="SOT-23-3 Maxim Integrated", Check_prices=https://www.snapeda.com/parts/MAX6006BEUR+T/Analog+Devices/view-part/?ref=eda, MF="Analog Devices", MP=MAX6006BEUR+T, SnapEDA_Link=https://www.snapeda.com/parts/MAX6006BEUR+T/Analog+Devices/view-part/?ref=snap
U8: "DIGITAL HUMIDITY, PRESSURE AND TEMPERATURE SENSOR<br>* Digital interface IÂ²C (up to 3.4 MHz) and SPI (3 and 4 wire, up to 10 MHz)* Supply voltage VDD main supply voltage range: 1.71 V to 3.6 V*VDDIO interface voltage range: 1.2 V to 3.6 V<br> Operating range -40â€", Package=None, Availability=Unavailable, MP=BME280, Price=None
U9: "Smoke Sensor winson"
U10: library part GM-802B_1, "Pin Configuration: / Winsen Electronics /  / Pin 1 (RH1): Heater terminal 1 / winsen-sensor.com /  / Pin 2: Not connected /  / Pin 3 (RH2): Heater terminal 2 /  / Pin 4: Not connected / Winsen Electronics /  / Pin 5 (RS1): Sensor output terminal 1 (signal) /  / Pin 6: Not connected /  / Pin 7 (RS2): Sensor output terminal 2 (signal) /  / Pin 8: Not connected", JLCPCB Part Class="Extended Part", Add into BOM=yes, Convert to PCB=yes, Device=GM-802B, LCSC Part Name=GM-802B, Manufacturer Part=GM-802B, Supplier=LCSC, Supplier Footprint=LCC-8_L5.0-W5.0-P1.27, Supplier Part=C9900008830, Symbol=GM-802B
U11: "The GM-402B is a compact MEMS-based combustible gas sensor by Winsen Electronics, designed to detect gases like methane (CH₄) and propane (C₃H₈) within a 1–10,000 ppm range. The sensor features an 8-pin SMD package with the following", JLCPCB Part Class="Extended Part", LCSC Part Name=可燃气体传感器, Manufacturer=Winsen(炜盛), Add into BOM=yes, Convert to PCB=yes, Datasheet=https://atta.szlcsc.com/upload/public/pdf/source/20170413/1492062922238.pdf, Device=GM-402B, Manufacturer Part=GM-402B, Supplier=LCSC, Supplier Footprint=SMD-8P,5x5mm, Supplier Part=C99754, Symbol=GM-402B
U12: "Ra-02 LoRa RF M5Stack Platform Evaluation Expansion Board", Package=None, Availability=Unavailable, MP=RA-02_LORA, Price=None
U13: library part GSM_SIM800C, Package=SIM900_SMT, DeviceName=SIM800C, DeviceSetName=GSM_SIM900_LITERAL, GateName_1=G$1, LibraryName=microbuilder, SymbolName_1=SIM900_LITERAL
U14: library part SMF05C, DeviceSetName=TVSARRAY_5LANE, GateName_1=G$1, LibraryName=microbuilder, Package=SOT363, SymbolName_1=TVSARRAY_5LANE

## Via types
v1: diameter 24, hole 12, Top Layer to Bottom Layer, 75 vias
v2: diameter 60, hole 30, Top Layer to Bottom Layer, 7 vias
v3: diameter 100, hole 98.43, Top Layer to Bottom Layer, 4 vias

## Nets (pads, with @x,y where several pads share a name; then routed paths per layer and width w, separated by ;. In a path a pad name is that pad's centre, name@x,y a point inside that pad or via, vN(x,y) a via of type N, cw(c..) or ccw(c..) an arc to the next point about the centre after c; other vN are vias at no path point)
2V: C26.2 C30.2 U7.2 U10.1 | length 584.4
  Top Layer w15: U7.2@418.73,2456.4 C26.2@524.84,2456.4 ; C26.2@525,2456.56 760.44,2456.56 799,2418 C30.2@799,2349.56 800.11,2348.45 916.83,2348.45 U10.1@917.94,2347.34
2V5: C22.2 C31.2 U6.5 U9.1 | length 655.3
  Top Layer w15: U6.5@435,2200.4 435.97,2199.43 523.03,2199.43 C22.2@524,2198.46 743.54,2198.46 786,2156 C31.2@786,1999.56 786.61,1998.95 914.33,1998.95 U9.1@914.94,1998.34
2V8: C19.2 C33.2 U4.1 U11.1 | length 501.4
  Top Layer w15: U4.1@429.4,2707 430.84,2705.56 C19.2@533,2705.56 535.5,2703.06 C33.2@799.5,2703.06 ; C33.2@802,2702.56 803.66,2704.22 928.64,2704.22 U11.1@930.3,2705.89
3V3: C1.1 C3.1 C13.2 C14.2 C15.2 C28.2 C29.2 C32.2 C34.2 C35.2 C36.2 C37.2 J3.01 L1.2 R3.1 R4.1 R5.1 R6.2 R7.2 R8.2 R11.2 R20.2 R28.2 R32.2 U1.2 U8.2 U8.6 U8.8 U9.7 U10.7 U11.7 U12.3 | length 4056.5
  Top Layer w15: L1.2@267,1390.65 267,1496 285,1514 443.54,1514 C14.2@446,1511.54 551.99,1511.55 553.05,1510.51 R11.2@732.95,1510.51 ; R11.2@733,1510.56 779.44,1510.56 ; R8.2@795,1274 795,1495 779.44,1510.56 ; R20.2@955,1510.56 R20.2@953,1510.56 ; C29.2@955.28,1569.72 955.28,1512.84 R20.2@953,1510.56 ; C29.2@955.56,1570 955.56,1604.44 ; C28.2@955.56,1644 955.56,1604.44 ; C28.2@956.56,1645 956.87,1644.69 U8.8@1016.51,1644.69 ; U8.6@1016.81,1593.2 985.8,1593.2 974.56,1604.44 955.56,1604.44 ; U8.8@1016.81,1644.39 1051.61,1644.39 1075.85,1620.15 1091.83,1620.15 U8.2@1093.19,1618.8 1134.8,1618.8 v1(1160,1644) ; U11.7@1087.7,2705.89 1088.36,2705.22 1192.34,2705.22 C34.2@1193,2704.56 1285.44,2704.56 1322.56,2667.44 C37.2@1322.56,2563 ; v1(1089.09,2075.83) 1087.06,2073.8 U9.7@1087.06,1998.34 1087.17,1998.45 1191.89,1998.45 C32.2@1192,1998.56 v1(1192,2071) ; U10.7@1090.06,2347.34 1091.45,2345.95 1189.61,2345.95 C35.2@1191,2344.56 ; v1(1191,2400) C35.2@1191,2344.56 ; U12.3@1415,2563 C37.2@1322.56,2563 ; J3.01@2005,1910 2115,1910 v1(2117,1912) ; v1(2227,2469) C1.1@2227,2519.44 C3.1@2305,2519.44 2305,2381 2321,2365 R6.2@2357.44,2365 2357.44,2264.56 2466,2156 R5.1@2466,2078.56 ; R4.1@2318.44,1733 2318.44,1694.56 2334,1679 v1(2381,1679) ; v1(2379.83,2069.09) 2384.29,2073.56 R5.1@2466,2073.56 ; v1(2483,2641) 2487,2637 R3.1@2487,2587.56 2532.21,2587.56 2541,2578.77 2541,2537 2560,2518 U1.2@2603.02,2518 ; v1(3275.22,1667.22) 3276.44,1668.44 R7.2@3346,1668.44 ; v1(3494,1964) 3541.44,1964 R28.2@3544.44,1961 ; v1(4243,1867) 4243,1951.44 R32.2@4243.56,1952 ; 779.44,1510.56 R20.2@953,1510.56 ; C35.2@1191,2344.56 1284.56,2344.56 1320.56,2380.56 C36.2@1320.56,2482 1321.56,2483 1321.56,2562 C37.2@1322.56,2563
4V: C21.2 C23.2 C24.2 C38.1 C39.2 C40.2 C41.2 L3.2 R18.2 U13.34 U13.35 | length 4955.5
  Top Layer w15: R18.2@426,1975.56 C21.2@508,1975.56 ; C38.1@3630.06,2559.89 C38.1@3639.5,2550.46
  Top Layer w25: L3.2@262,1854.65 262,1948 289.56,1975.56 R18.2@426,1975.56 ; C21.2@510.52,1975.66 510.52,2025.36 525.16,2040 645,2040 662.46,2022.54 C23.2@662.46,1827 ; C24.2@661.46,1700 C23.2@661.46,1826 ; 3476,2511 3521.52,2556.52 C39.2@3521.52,2641.48 3621.28,2641.48 3630.06,2632.69 C38.1@3630.06,2559.89 ; C39.2@3521.89,2651.5 C40.2@3521.89,2735.85 ; C40.2@3522.52,2736.48 C41.2@3522.52,2827.48 ; C38.1@3639.5,2550.46 3811.15,2550.46 U13.35@3811.15,2507.15
  Top Layer w50: C24.2@661.46,1700 742,1700 v2(743,1701) ; v2(3412,2511) 3476,2511
  Bottom Layer w50: v2(743,1701) 1287,1701 1349.41,1763.41 1349.41,2070.41 1463,2184 2457,2184 2784,2511 v2(3412,2511)